# EAGLE board production (EAGLE 9.5.2)
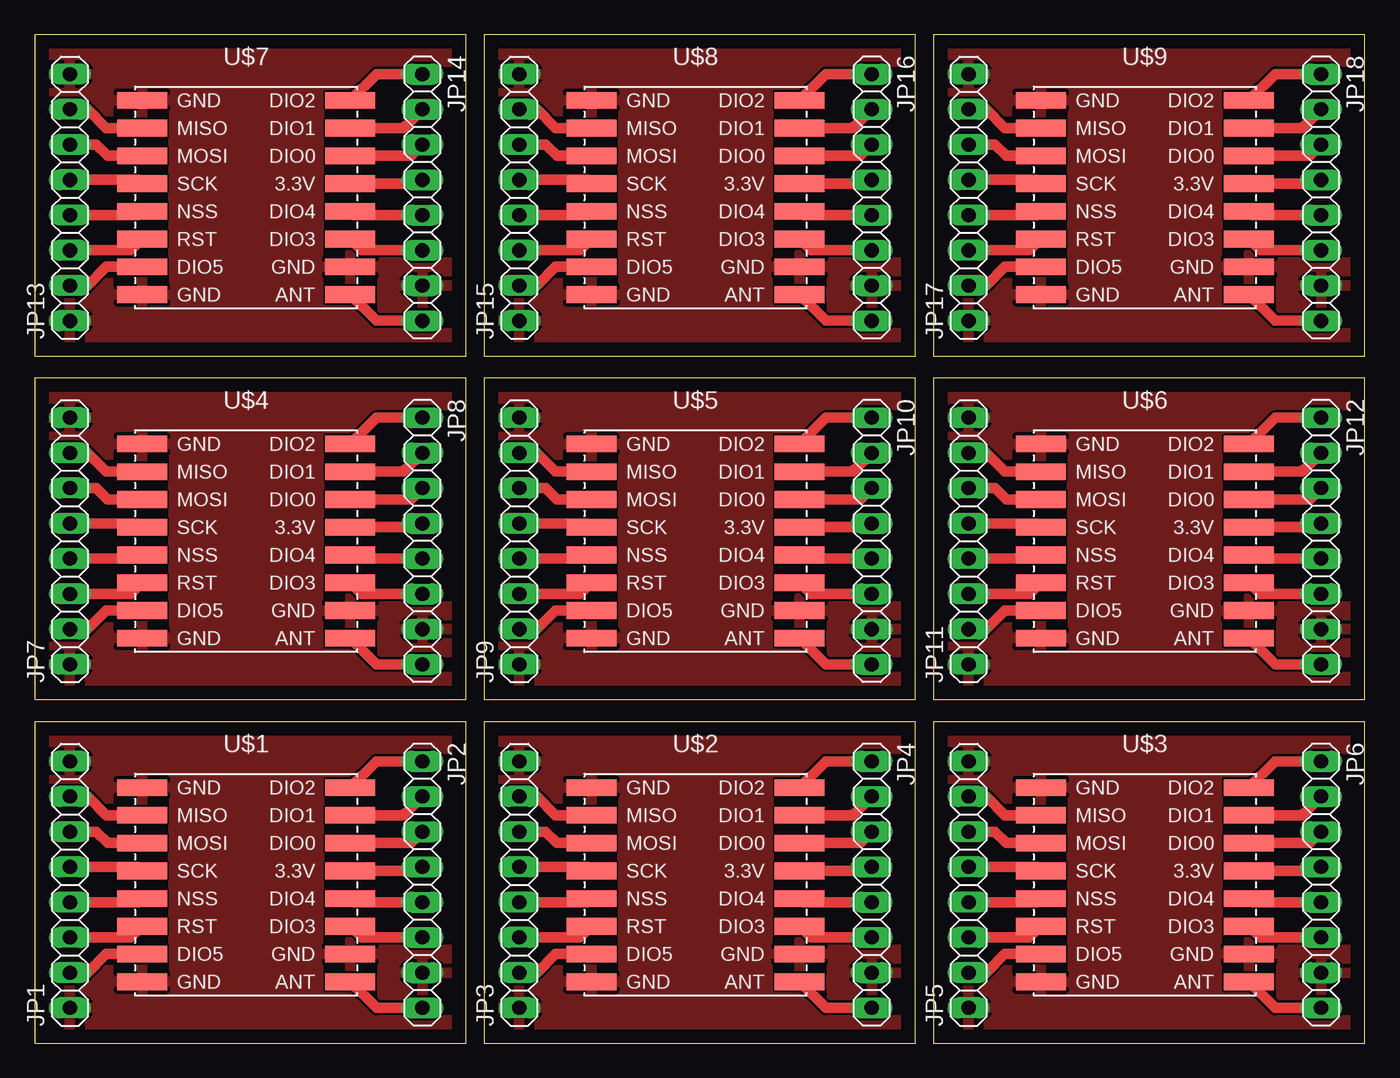
[diagram p0: board, top side]

Size 95.86 x 72.69 mm. Coordinates in mm from the lower left corner, seen from the top.
Outline: 0,0 31.09,0 31.09,23.16 0,23.16 0,0
Outline: 32.38,0 63.48,0 63.48,23.16 32.38,23.16 32.38,0
Outline: 64.77,0 95.86,0 95.86,23.16 64.77,23.16 64.77,0
Outline: 0,24.77 31.09,24.77 31.09,47.93 0,47.93 0,24.77
Outline: 32.38,24.77 63.48,24.77 63.48,47.93 32.38,47.93 32.38,24.77
Outline: 64.77,24.77 95.86,24.77 95.86,47.93 64.77,47.93 64.77,24.77
Outline: 0,49.53 31.09,49.53 31.09,72.69 0,72.69 0,49.53
Outline: 32.38,49.53 63.48,49.53 63.48,72.69 32.38,72.69 32.38,49.53
Outline: 64.77,49.53 95.86,49.53 95.86,72.69 64.77,72.69 64.77,49.53
Copper layers (1*16): Top 0.035mm / dielectric 1.5mm / Bottom 0.035mm
Design rules "default": minimum track width 6mil, minimum drill 0.35mm, track to track 6mil, track to pad 6mil, pad to pad 6mil, via to via 6mil, smd to smd 6mil, copper to edge 40mil, drill to drill 6mil, minimum pad ring 10mil, minimum via ring 8mil, stop-mask expansion 4mil, vias tented up to drill 0mil, thermal gap 10mil

## Footprints (pad centres in the part's own frame; a part is rotated, then mirrored left to right if it is on the bottom)
1X08 = drill 1.016 long: 1 -8.89,0; 2 -6.35,0; 3 -3.81,0; 4 -1.27,0; 5 1.27,0; 6 3.81,0; 7 6.35,0; 8 8.89,0
WIRELESS-LORA-RFM95W#SMD = smd 3.6 x 1.2: A1 -7.5,7; A2 -7.5,5; A3 -7.5,3; A4 -7.5,1; A5 -7.5,-1; A6 -7.5,-3; A7 -7.5,-5; A8 -7.5,-7; B1 7.5,7; B2 7.5,5; B3 7.5,3; B4 7.5,1; B5 7.5,-1; B6 7.5,-3; B7 7.5,-5; B8 7.5,-7

## Placement (x,y rotation side)
JP1  [1X08]  2.54,11.43 90 top
JP2  [1X08]  27.94,11.43 270 top
JP3  [1X08]  34.92,11.43 90 top
JP4  [1X08]  60.33,11.43 270 top
JP5  [1X08]  67.31,11.43 90 top
JP6  [1X08]  92.71,11.43 270 top
JP7  [1X08]  2.54,36.2 90 top
JP8  [1X08]  27.94,36.2 270 top
JP9  [1X08]  34.92,36.2 90 top
JP10  [1X08]  60.33,36.2 270 top
JP11  [1X08]  67.31,36.2 90 top
JP12  [1X08]  92.71,36.2 270 top
JP13  [1X08]  2.54,60.96 90 top
JP14  [1X08]  27.94,60.96 270 top
JP15  [1X08]  34.92,60.96 90 top
JP16  [1X08]  60.33,60.96 270 top
JP17  [1X08]  67.31,60.96 90 top
JP18  [1X08]  92.71,60.96 270 top
U$1  WIRELESS-LORA-RFM95W#SMD  [WIRELESS-LORA-RFM95W#SMD]  15.24,11.43 0 top
U$2  WIRELESS-LORA-RFM95W#SMD  [WIRELESS-LORA-RFM95W#SMD]  47.62,11.43 0 top
U$3  WIRELESS-LORA-RFM95W#SMD  [WIRELESS-LORA-RFM95W#SMD]  80.01,11.43 0 top
U$4  WIRELESS-LORA-RFM95W#SMD  [WIRELESS-LORA-RFM95W#SMD]  15.24,36.2 0 top
U$5  WIRELESS-LORA-RFM95W#SMD  [WIRELESS-LORA-RFM95W#SMD]  47.62,36.2 0 top
U$6  WIRELESS-LORA-RFM95W#SMD  [WIRELESS-LORA-RFM95W#SMD]  80.01,36.2 0 top
U$7  WIRELESS-LORA-RFM95W#SMD  [WIRELESS-LORA-RFM95W#SMD]  15.24,60.96 0 top
U$8  WIRELESS-LORA-RFM95W#SMD  [WIRELESS-LORA-RFM95W#SMD]  47.62,60.96 0 top
U$9  WIRELESS-LORA-RFM95W#SMD  [WIRELESS-LORA-RFM95W#SMD]  80.01,60.96 0 top

## Library data of the parts
JP1-JP18 = pinhead
U$1-U$9 = dht22

## Nets
ANT: JP2.8 U$1.B8
ANT1: JP4.8 U$2.B8
ANT2: JP6.8 U$3.B8
ANT3: JP8.8 U$4.B8
ANT4: JP10.8 U$5.B8
ANT5: JP12.8 U$6.B8
ANT6: JP14.8 U$7.B8
ANT7: JP16.8 U$8.B8
ANT8: JP18.8 U$9.B8
DIO1: JP3.2 U$2.A7
DIO2: JP5.2 U$3.A7
DIO3: JP7.2 U$4.A7
DIO4: JP9.2 U$5.A7
DIO5: JP1.2 U$1.A7
DIO6: JP11.2 U$6.A7
DIO7: JP13.2 U$7.A7
DIO8: JP15.2 U$8.A7
DIO9: JP17.2 U$9.A7
GND: JP1.1 JP1.8 JP2.7 U$1.A1 U$1.A8 U$1.B7
GND1: JP3.1 JP3.8 JP4.7 U$2.A1 U$2.A8 U$2.B7
GND2: JP5.1 JP5.8 JP6.7 U$3.A1 U$3.A8 U$3.B7
GND3: JP7.1 JP7.8 JP8.7 U$4.A1 U$4.A8 U$4.B7
GND4: JP9.1 JP9.8 JP10.7 U$5.A1 U$5.A8 U$5.B7
GND5: JP11.1 JP11.8 JP12.7 U$6.A1 U$6.A8 U$6.B7
GND6: JP13.1 JP13.8 JP14.7 U$7.A1 U$7.A8 U$7.B7
GND7: JP15.1 JP15.8 JP16.7 U$8.A1 U$8.A8 U$8.B7
GND8: JP17.1 JP17.8 JP18.7 U$9.A1 U$9.A8 U$9.B7
INT: JP2.3 U$1.B3
INT1: JP4.3 U$2.B3
INT2: JP6.3 U$3.B3
INT3: JP8.3 U$4.B3
INT4: JP10.3 U$5.B3
INT5: JP12.3 U$6.B3
INT6: JP14.3 U$7.B3
INT7: JP16.3 U$8.B3
INT8: JP18.3 U$9.B3
IO1: JP2.2 U$1.B2
IO2: JP2.1 U$1.B1
IO3: JP2.6 U$1.B6
IO4: JP2.5 U$1.B5
IO5: JP4.1 U$2.B1
IO6: JP4.2 U$2.B2
IO7: JP4.5 U$2.B5
IO8: JP4.6 U$2.B6
IO9: JP6.1 U$3.B1
IO10: JP6.2 U$3.B2
IO11: JP6.5 U$3.B5
IO12: JP6.6 U$3.B6
IO13: JP8.1 U$4.B1
IO14: JP8.2 U$4.B2
IO15: JP8.5 U$4.B5
IO16: JP8.6 U$4.B6
IO17: JP10.1 U$5.B1
IO18: JP10.2 U$5.B2
IO19: JP10.5 U$5.B5
IO20: JP10.6 U$5.B6
IO21: JP12.1 U$6.B1
IO22: JP12.2 U$6.B2
IO23: JP12.5 U$6.B5
IO24: JP12.6 U$6.B6
IO25: JP14.1 U$7.B1
IO26: JP14.2 U$7.B2
IO27: JP14.5 U$7.B5
IO28: JP14.6 U$7.B6
IO29: JP16.1 U$8.B1
IO30: JP16.2 U$8.B2
IO31: JP16.5 U$8.B5
IO32: JP16.6 U$8.B6
IO33: JP18.1 U$9.B1
IO34: JP18.2 U$9.B2
IO35: JP18.5 U$9.B5
IO36: JP18.6 U$9.B6
MISO: JP1.7 U$1.A2
MISO1: JP3.7 U$2.A2
MISO2: JP5.7 U$3.A2
MISO3: JP7.7 U$4.A2
MISO4: JP9.7 U$5.A2
MISO5: JP11.7 U$6.A2
MISO6: JP13.7 U$7.A2
MISO7: JP15.7 U$8.A2
MISO8: JP17.7 U$9.A2
MOSI: JP1.6 U$1.A3
MOSI1: JP3.6 U$2.A3
MOSI2: JP5.6 U$3.A3
MOSI3: JP7.6 U$4.A3
MOSI4: JP9.6 U$5.A3
MOSI5: JP11.6 U$6.A3
MOSI6: JP13.6 U$7.A3
MOSI7: JP15.6 U$8.A3
MOSI8: JP17.6 U$9.A3
NSS: JP1.4 U$1.A5
NSS1: JP3.4 U$2.A5
NSS2: JP5.4 U$3.A5
NSS3: JP7.4 U$4.A5
NSS4: JP9.4 U$5.A5
NSS5: JP11.4 U$6.A5
NSS6: JP13.4 U$7.A5
NSS7: JP15.4 U$8.A5
NSS8: JP17.4 U$9.A5
RST: JP1.3 U$1.A6
RST1: JP3.3 U$2.A6
RST2: JP5.3 U$3.A6
RST3: JP7.3 U$4.A6
RST4: JP9.3 U$5.A6
RST5: JP11.3 U$6.A6
RST6: JP13.3 U$7.A6
RST7: JP15.3 U$8.A6
RST8: JP17.3 U$9.A6
SCK: JP1.5 U$1.A4
SCK1: JP3.5 U$2.A4
SCK2: JP5.5 U$3.A4
SCK3: JP7.5 U$4.A4
SCK4: JP9.5 U$5.A4
SCK5: JP11.5 U$6.A4
SCK6: JP13.5 U$7.A4
SCK7: JP15.5 U$8.A4
SCK8: JP17.5 U$9.A4
VCC: JP2.4 U$1.B4
VCC1: JP4.4 U$2.B4
VCC2: JP6.4 U$3.B4
VCC3: JP8.4 U$4.B4
VCC4: JP10.4 U$5.B4
VCC5: JP12.4 U$6.B4
VCC6: JP14.4 U$7.B4
VCC7: JP16.4 U$8.B4
VCC8: JP18.4 U$9.B4

## Tracks (layer width: path | path; a pad name or v marks a point on that pad's centre or on a via)
ANT
  Top 0.762: JP2.8 24.63,2.54 U$1.B8
ANT1
  Top 0.762: JP4.8 57.02,2.54 U$2.B8
ANT2
  Top 0.762: JP6.8 89.4,2.54 U$3.B8
ANT3
  Top 0.762: JP8.8 24.63,27.3 U$4.B8
ANT4
  Top 0.762: JP10.8 57.02,27.3 U$5.B8
ANT5
  Top 0.762: JP12.8 89.4,27.3 U$6.B8
ANT6
  Top 0.762: JP14.8 24.63,52.07 U$7.B8
ANT7
  Top 0.762: JP16.8 57.02,52.07 U$8.B8
ANT8
  Top 0.762: JP18.8 89.4,52.07 U$9.B8
DIO1
  Top 0.762: JP3.2 36.2,5.08 37.55,6.43 U$2.A7
DIO2
  Top 0.762: JP5.2 68.58,5.08 69.93,6.43 U$3.A7
DIO3
  Top 0.762: JP7.2 3.81,29.84 5.16,31.2 U$4.A7
DIO4
  Top 0.762: JP9.2 36.2,29.84 37.55,31.2 U$5.A7
DIO5
  Top 0.762: JP1.2 3.81,5.08 5.16,6.43 U$1.A7
DIO6
  Top 0.762: JP11.2 68.58,29.84 69.93,31.2 U$6.A7
DIO7
  Top 0.762: JP13.2 3.81,54.61 5.16,55.96 U$7.A7
DIO8
  Top 0.762: JP15.2 36.2,54.61 37.55,55.96 U$8.A7
DIO9
  Top 0.762: JP17.2 68.58,54.61 69.93,55.96 U$9.A7
GND
  pour Top: 0,0 0,23.5 31.11,23.5 31.11,0
GND1
  pour Top: 32.38,0 32.38,23.5 63.5,23.5 63.5,0
GND2
  pour Top: 64.77,0 64.77,23.5 95.89,23.5 95.89,0
GND3
  pour Top: 0,24.77 0,48.26 31.11,48.26 31.11,24.77
GND4
  pour Top: 32.38,24.77 32.38,48.26 63.5,48.26 63.5,24.77
GND5
  pour Top: 64.77,24.77 64.77,48.26 95.89,48.26 95.89,24.77
GND6
  pour Top: 0,49.53 0,73.03 31.11,73.03 31.11,49.53
GND7
  pour Top: 32.38,49.53 32.38,73.03 63.5,73.03 63.5,49.53
GND8
  pour Top: 64.77,49.53 64.77,73.03 95.89,73.03 95.89,49.53
INT
  Top 0.762: JP2.3 27.13,14.43 U$1.B3
INT1
  Top 0.762: JP4.3 59.52,14.43 U$2.B3
INT2
  Top 0.762: JP6.3 91.9,14.43 U$3.B3
INT3
  Top 0.762: JP8.3 27.13,39.2 U$4.B3
INT4
  Top 0.762: JP10.3 59.52,39.2 U$5.B3
INT5
  Top 0.762: JP12.3 91.9,39.2 U$6.B3
INT6
  Top 0.762: JP14.3 27.13,63.96 U$7.B3
INT7
  Top 0.762: JP16.3 59.52,63.96 U$8.B3
INT8
  Top 0.762: JP18.3 91.9,63.96 U$9.B3
IO1
  Top 0.762: JP2.2 26.7,16.54 26.64,16.54 26.54,16.43 U$1.B2
IO2
  Top 0.762: U$1.B1 24.63,20.32 JP2.1
IO3
  Top 0.762: JP2.6 23.55,7.62 U$1.B6
IO4
  Top 0.762: JP2.5 23.01,10.16 U$1.B5
IO5
  Top 0.762: U$2.B1 57.02,20.32 JP4.1
IO6
  Top 0.762: JP4.2 59.08,16.54 59.03,16.54 58.92,16.43 U$2.B2
IO7
  Top 0.762: JP4.5 55.4,10.16 U$2.B5
IO8
  Top 0.762: JP4.6 55.94,7.62 U$2.B6
IO9
  Top 0.762: U$3.B1 89.4,20.32 JP6.1
IO10
  Top 0.762: JP6.2 91.47,16.54 91.41,16.54 91.31,16.43 U$3.B2
IO11
  Top 0.762: JP6.5 87.78,10.16 U$3.B5
IO12
  Top 0.762: JP6.6 88.32,7.62 U$3.B6
IO13
  Top 0.762: U$4.B1 24.63,45.09 JP8.1
IO14
  Top 0.762: JP8.2 26.7,41.3 26.64,41.3 26.54,41.2 U$4.B2
IO15
  Top 0.762: JP8.5 23.01,34.92 U$4.B5
IO16
  Top 0.762: JP8.6 23.55,32.38 U$4.B6
IO17
  Top 0.762: U$5.B1 57.02,45.09 JP10.1
IO18
  Top 0.762: JP10.2 59.08,41.3 59.03,41.3 58.92,41.2 U$5.B2
IO19
  Top 0.762: JP10.5 55.4,34.92 U$5.B5
IO20
  Top 0.762: JP10.6 55.94,32.38 U$5.B6
IO21
  Top 0.762: U$6.B1 89.4,45.09 JP12.1
IO22
  Top 0.762: JP12.2 91.47,41.3 91.41,41.3 91.31,41.2 U$6.B2
IO23
  Top 0.762: JP12.5 87.78,34.92 U$6.B5
IO24
  Top 0.762: JP12.6 88.32,32.38 U$6.B6
IO25
  Top 0.762: U$7.B1 24.63,69.85 JP14.1
IO26
  Top 0.762: JP14.2 26.7,66.06 26.64,66.06 26.54,65.96 U$7.B2
IO27
  Top 0.762: JP14.5 23.01,59.69 U$7.B5
IO28
  Top 0.762: JP14.6 23.55,57.15 U$7.B6
IO29
  Top 0.762: U$8.B1 57.02,69.85 JP16.1
IO30
  Top 0.762: JP16.2 59.08,66.06 59.03,66.06 58.92,65.96 U$8.B2
IO31
  Top 0.762: JP16.5 55.4,59.69 U$8.B5
IO32
  Top 0.762: JP16.6 55.94,57.15 U$8.B6
IO33
  Top 0.762: U$9.B1 89.4,69.85 JP18.1
IO34
  Top 0.762: JP18.2 91.47,66.06 91.41,66.06 91.31,65.96 U$9.B2
IO35
  Top 0.762: JP18.5 87.78,59.69 U$9.B5
IO36
  Top 0.762: JP18.6 88.32,57.15 U$9.B6
MISO
  Top 0.762: JP1.7 3.81,17.78 5.16,16.43 U$1.A2
MISO1
  Top 0.762: JP3.7 36.2,17.78 37.55,16.43 U$2.A2
MISO2
  Top 0.762: JP5.7 68.58,17.78 69.93,16.43 U$3.A2
MISO3
  Top 0.762: JP7.7 3.81,42.55 5.16,41.2 U$4.A2
MISO4
  Top 0.762: JP9.7 36.2,42.55 37.55,41.2 U$5.A2
MISO5
  Top 0.762: JP11.7 68.58,42.55 69.93,41.2 U$6.A2
MISO6
  Top 0.762: JP13.7 3.81,67.31 5.16,65.96 U$7.A2
MISO7
  Top 0.762: JP15.7 36.2,67.31 37.55,65.96 U$8.A2
MISO8
  Top 0.762: JP17.7 68.58,67.31 69.93,65.96 U$9.A2
MOSI
  Top 0.762: JP1.6 4.45,15.24 5.25,14.43 U$1.A3
MOSI1
  Top 0.762: JP3.6 36.83,15.24 37.64,14.43 U$2.A3
MOSI2
  Top 0.762: JP5.6 69.22,15.24 70.03,14.43 U$3.A3
MOSI3
  Top 0.762: JP7.6 4.45,40.01 5.25,39.2 U$4.A3
MOSI4
  Top 0.762: JP9.6 36.83,40.01 37.64,39.2 U$5.A3
MOSI5
  Top 0.762: JP11.6 69.22,40.01 70.03,39.2 U$6.A3
MOSI6
  Top 0.762: JP13.6 4.45,64.77 5.25,63.96 U$7.A3
MOSI7
  Top 0.762: JP15.6 36.83,64.77 37.64,63.96 U$8.A3
MOSI8
  Top 0.762: JP17.6 69.22,64.77 70.03,63.96 U$9.A3
NSS
  Top 0.762: JP1.4 7.47,10.16 U$1.A5
NSS1
  Top 0.762: JP3.4 39.85,10.16 U$2.A5
NSS2
  Top 0.762: JP5.4 72.24,10.16 U$3.A5
NSS3
  Top 0.762: JP7.4 7.47,34.92 U$4.A5
NSS4
  Top 0.762: JP9.4 39.85,34.92 U$5.A5
NSS5
  Top 0.762: JP11.4 72.24,34.92 U$6.A5
NSS6
  Top 0.762: JP13.4 7.47,59.69 U$7.A5
NSS7
  Top 0.762: JP15.4 39.85,59.69 U$8.A5
NSS8
  Top 0.762: JP17.4 72.24,59.69 U$9.A5
RST
  Top 0.762: JP1.3 6.93,7.62 U$1.A6
RST1
  Top 0.762: JP3.3 39.31,7.62 U$2.A6
RST2
  Top 0.762: JP5.3 71.7,7.62 U$3.A6
RST3
  Top 0.762: JP7.3 6.93,32.38 U$4.A6
RST4
  Top 0.762: JP9.3 39.31,32.38 U$5.A6
RST5
  Top 0.762: JP11.3 71.7,32.38 U$6.A6
RST6
  Top 0.762: JP13.3 6.93,57.15 U$7.A6
RST7
  Top 0.762: JP15.3 39.31,57.15 U$8.A6
RST8
  Top 0.762: JP17.3 71.7,57.15 U$9.A6
SCK
  Top 0.762: U$1.A4 7.47,12.7 JP1.5
SCK1
  Top 0.762: U$2.A4 39.85,12.7 JP3.5
SCK2
  Top 0.762: U$3.A4 72.24,12.7 JP5.5
SCK3
  Top 0.762: U$4.A4 7.47,37.47 JP7.5
SCK4
  Top 0.762: U$5.A4 39.85,37.47 JP9.5
SCK5
  Top 0.762: U$6.A4 72.24,37.47 JP11.5
SCK6
  Top 0.762: U$7.A4 7.47,62.23 JP13.5
SCK7
  Top 0.762: U$8.A4 39.85,62.23 JP15.5
SCK8
  Top 0.762: U$9.A4 72.24,62.23 JP17.5
VCC
  Top 0.762: JP2.4 27.67,12.43 U$1.B4
VCC1
  Top 0.762: JP4.4 60.05,12.43 U$2.B4
VCC2
  Top 0.762: JP6.4 92.44,12.43 U$3.B4
VCC3
  Top 0.762: JP8.4 27.67,37.2 U$4.B4
VCC4
  Top 0.762: JP10.4 60.05,37.2 U$5.B4
VCC5
  Top 0.762: JP12.4 92.44,37.2 U$6.B4
VCC6
  Top 0.762: JP14.4 27.67,61.96 U$7.B4
VCC7
  Top 0.762: JP16.4 60.05,61.96 U$8.B4
VCC8
  Top 0.762: JP18.4 92.44,61.96 U$9.B4